# Altium PCB BMSPCB.PcbDoc
Units mil, origin at the board's own origin, x right, y up, seen from the top; angles counter-clockwise.
Board outline 6000 x 4000 mil, 2 copper layers (Top Layer, Bottom Layer); 19 components, 32 nets, 47 pads, 0 vias.
Unrouted connection lines stored in the file: 24.
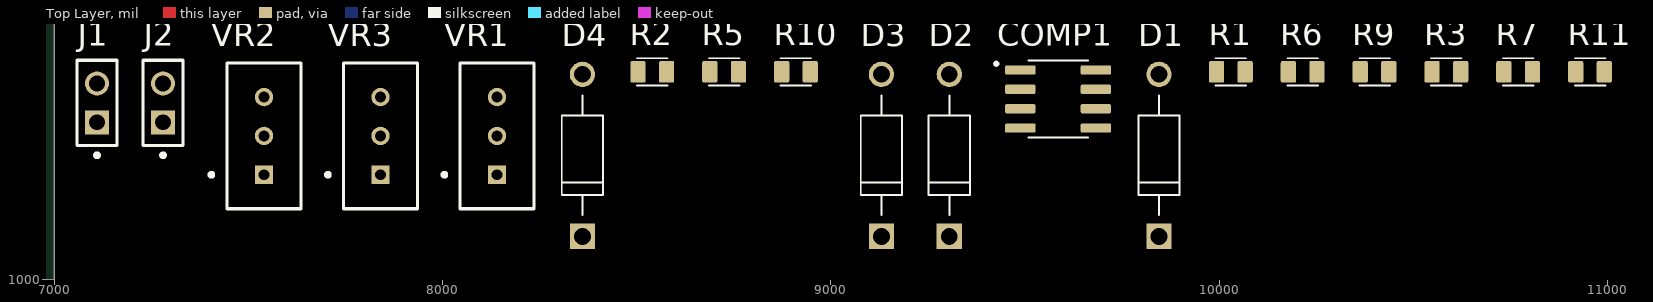
[diagram p0: Top Layer view]
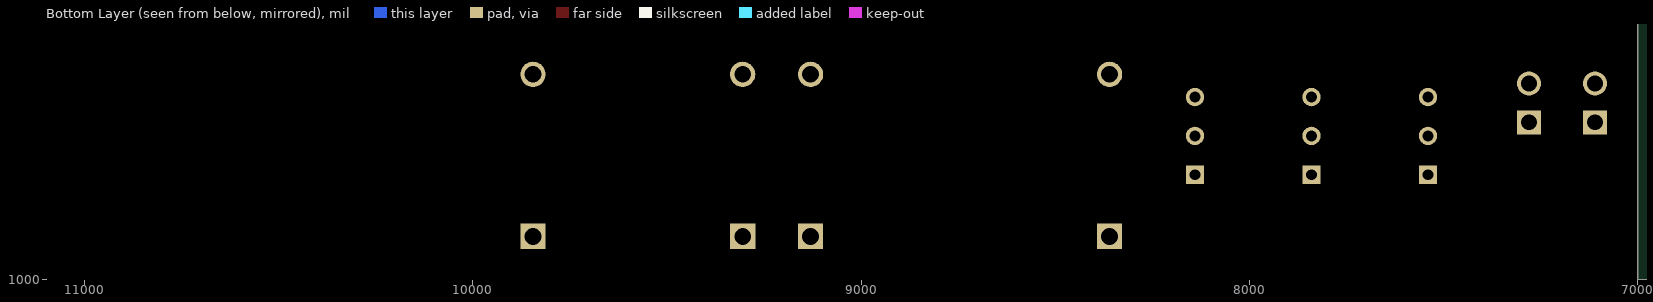
[diagram p1: Bottom Layer view, seen from below]

## Layer stack, top to bottom
Top Solder: solder mask 0.4, Solder Resist, Dk 3.5
Top Layer: signal copper 1.4
Dielectric 1: dielectric 12.6, FR-4, Dk 4.8
Bottom Layer: signal copper 1.4
Bottom Solder: solder mask 0.4, Solder Resist, Dk 3.5

## Board outline
1000,1000 7000,1000 7000,5000 1000,5000

## Design rules (kind name [scope] priority, off if disabled: settings)
Clearance [All] p1: gap=10 ignorepadtopadclearanceinfootprint=FALSE except(0: Arc-Hole Track-Hole SMDPad-Hole THPad-Hole Via-Hole Fill-Hole Poly-Hole Region-Hole Text-Hole)
PolygonConnect [All] p1: connectstyle=Relief reliefconductorwidth=10 reliefentries=4 polygonreliefangle="90 Angle" airgapwidth=10
RoomDefinition BMS-Shem-v1 [InComponentClass('BMS-Shem-v1')] p1: confinementstyle=ConfineIn formatcopy=TRUE lockcomponents=FALSE outline 7045,1060 11045,1060 11045,1680 7045,1680
RoutingVias [All] p1: holewidth=28 width=50 viastyle="Through Hole" minholewidth=28 minwidth=50 maxholewidth=28 maxwidth=50
SolderMaskExpansion [All] p1: expansion=4 istentingtop=FALSE
Width [All] p1: maxlimit=10 minlimit=10 preferedwidth=10
30 further rules are at their usual default settings.

## Components (designator, comment, footprint, x,y, rotation, side; value= is the part's Value field where it differs from the comment)
COMP1 "TL431" SOIC127P599X175-8N 9585,1465 r0 top
D1 "Diode" DIOAD1060W80L520D270 9845,1320 r90 top
D2 "Diode" DIOAD1060W80L520D270 9305,1320 r90 top
D3 "Diode" DIOAD1060W80L520D270 9130,1320 r90 top
D4 "Diode" DIOAD1060W80L520D270 8360,1320 r90 top
J1 "M20-9990246" FP-M20-9990246-MFG 7110,1455 r90 top
J2 "M20-9990246" FP-M20-9990246-MFG 7280,1455 r90 top
R1 "20k" RESC2012X65N 10030,1535 r0 top
R2 "20k" RESC2012X65N 8540,1535 r0 top
R3 "1k" RESC2012X65N 10585,1535 r0 top
R5 "20k" RESC2012X65N 8725,1535 r0 top
R6 "20k" RESC2012X65N 10215,1535 r0 top
R7 "1k" RESC2012X65N 10770,1535 r0 top
R9 "20k" RESC2012X65N 10400,1535 r0 top
R10 "20k" RESC2012X65N 8910,1535 r0 top
R11 "1k" RESC2012X65N 10955,1535 r0 top
VR1 "Res_Bourns_3296W-1-502LF_eec" Bourns_3296W-1-502LF_0 8140,1370 r0 top value=5kΩ
VR2 "Res_Bourns_3296W-1-502LF_eec" Bourns_3296W-1-502LF_0 7540,1370 r0 top value=5kΩ
VR3 "Res_Bourns_3296W-1-502LF_eec" Bourns_3296W-1-502LF_0 7840,1370 r0 top value=5kΩ

## Footprints (in the part's own frame and the unit in brackets; to place one, negate y for a bottom-side part, rotate by r counter-clockwise, add the part's x,y. Pads: shape width x height; smd on the part's side, far side on the other; paste and mask are expansions set on the pad)
Bourns_3296W-1-502LF_0 [mm]
  rect 1.2x1.2 hole 0.7 paste-1000 mask+0: 1(0.005,-2.54)
  round 1.2 hole 0.7 paste-1000 mask+0: 2(0.005,0) 3(0.005,2.54)
  silkscreen extent -3.56,-4.76 2.41,4.76, body extent -2.58,-4.99 2.58,4.99, height 0.25
DIOAD1060W80L520D270 [mm]
  round 1.65 hole 1.1: A(5.3,0)
  rect 1.65x1.65 hole 1.1: C(-5.3,0)
  silkscreen extent -3.9,-1.35 3.9,1.35
FP-M20-9990246-MFG [mm]
  rect 1.57x1.57 hole 1.02 paste-1000 mask+0: 1(-1.27,0)
  round 1.57 hole 1.02 paste-1000 mask+0: 2(1.27,0)
  silkscreen extent -3.55,-1.32 2.79,1.32, body extent -2.89,-1.42 2.89,1.42, height 0.25
RESC2012X65N [mm]
  rrect25% 1x1.42 smd: 1(-0.935,0) 2(0.935,0)
  silkscreen extent -1,-0.89 1,0.89
SOIC127P599X175-8N [mm]
  rrect25% 1.97x0.6 smd: 1(-2.47,1.905) 2(-2.47,0.635) 3(-2.47,-0.635) 4(-2.47,-1.905) 5(2.47,-1.905) 6(2.47,-0.635) 7(2.47,0.635) 8(2.47,1.905)
  silkscreen extent -4.14,-2.52 1.95,2.52

## Part data
COMP1: "Adjustable precision shunt regulator 8-SOIC 0 to 70", Package="SOIC-8 Texas Instruments", Availability=Good, DigiKey-Purchase-URL=https://snapeda.com/shop?store=DigiKey&id=4775895, MF="Texas Instruments", Mouser-Purchase-URL=https://snapeda.com/shop?store=Mouser&id=4775895, MP=TL431CD, Price=None, SnapEDA_Link=https://www.snapeda.com/parts/TL431CD/Texas%20Instruments/view-part/4775895/?ref=snap, Texas_Instruments-Purchase-URL=https://snapeda.com/shop?store=Texas+Instruments&id=4775895
D1 D2 D3 D4: "Diode Standard 1000V 1A Through Hole DO-204AL _DO-41_", Package="DO-41 Good-Ark", Availability=Unavailable, MF="ON Semiconductor", MP=1N4007, Price=None, SnapEDA_Link=https://www.snapeda.com/parts/1N4007/ON%20Semiconductor/view-part/2816213/?ref=snap
J1 J2: library part CMP-15831-000009-1, "CONN HEADER VERT 2POS 2.54MM", Current Rating=3A, Manufacturer=Harwin, Temperature="-40°C to +105°C", Temperature Range High=+105°C, Temperature Range Low=-40°C, Automotive=No, Category=Conn, ComponentLink2Description=Datasheet, ComponentLink2URL=https://cdn.harwin.com/pdfs/M20-999.pdf, Conn Gender=Male, Conn Orientation=Vertical, Contact Material=Tin,Nickel, Device Class L1=Connectors, Device Class L2="Headers and Wire Housings", Device Class L3=unset, Digikey Description="CONN HEADER VERT 2POS 2.54MM", Height=8.99mm, Lead Free=Yes, Manufacturer Part Number=M20-9990246, Mouser Description="2.54mm (0.1\") Pitch SIL Vertical PC Tail Pin Header, 6.1mm mating pin height, tin, 2 contacts", Number Of Contacts=2, Number Of Rows=1, Octopart=https://octopart.com/m20-9990246-harwin-2590635, Package=M20-9990246, Pitch=2.54mm, RoHS=TRUE
R1 R2 R5 R6 R9 R10: library part Resistor, "RES 20k OHM 1% 1/4W 0805", Package=0805, Power_Rating=".25 W", Resistance=.33, Tolerance=1%, Availability=Unavailable, EU_RoHS_Compliance="Compliant with Exemptions", MF="TE Connectivity", MP=2-2176053-0, Price=None, SnapEDA_Link=https://www.snapeda.com/parts/2-2176053-0/TE%20Connectivity/view-part/2214508/?ref=snap
R3 R7 R11: library part Resistor, "RES 1k OHM 1% 1/4W 0805", Package=0805, Power_Rating=".25 W", Resistance=.33, Tolerance=1%, Availability=Unavailable, EU_RoHS_Compliance="Compliant with Exemptions", MF="TE Connectivity", MP=2-2176053-0, Price=None, SnapEDA_Link=https://www.snapeda.com/parts/2-2176053-0/TE%20Connectivity/view-part/2214508/?ref=snap
VR1 VR2 VR3: "RES TRIMMER 5K OHM 0.5W PC PIN", Digikey Part Number=3296W-502LF-ND, Manufacturer=Bourns, Mouser Part Number=652-3296W-1-502LF, Package=PTH_9MM53_4MM83, Part Number=3296W-1-502LF, Power=500mW, Resistance=5kΩ, Temperature="-55°C to +125°C", Temperature Coefficient=±100ppm/°C, Temperature Range High=+125°C, Temperature Range Low=-55°C, Tolerance=±10%, ComponentLink1Description=Upverter, ComponentLink1URL=https://upverter.com/upn/revision/1712d714ad2c9eb5/, ComponentLink2Description=Datasheet, ComponentLink2URL=http://www.bourns.com/docs/Product-Datasheets/3296.pdf, Digikey Description="RES TRIMMER 5K OHM 0.5W PC PIN", helpURL=https://upverter.com/upn/revision/1712d714ad2c9eb5/, Lead Free=yes, Number of Turns=25, Price=1.73531008228, RoHS=TRUE, Supplier 1=Digi-Key, Supplier 2=Mouser, Supplier Part Number 1=3296W-502LF-ND, Supplier Part Number 2=652-3296W-1-502LF

## Nets (pads, with @x,y where several pads share a name; then routed paths per layer and width w, separated by ;. In a path a pad name is that pad's centre, name@x,y a point inside that pad or via, vN(x,y) a via of type N, cw(c..) or ccw(c..) an arc to the next point about the centre after c; other vN are vias at no path point)
NetCOMP1_1: COMP1.1 R3.1
NetCOMP1_6: COMP1.6 D4.C R6.2 R7.2 VR1.1 VR1.2
NetCOMP1_8: COMP1.8 R1.1 R2.2
NetCOMP2_1: R7.1
NetCOMP2_6: R9.2 R11.2 VR2.1 VR2.2
NetCOMP2_8: R5.2 R6.1
NetCOMP3_1: R11.1
NetCOMP3_6: J1.2 J2.2 VR3.1 VR3.2
NetCOMP3_8: R9.1 R10.2
NetD1_A: D1.A
NetD1_C: D1.C D2.A
NetD2_C: D2.C D3.A
NetD3_C: D3.C D4.A
NetD5_A: 
NetD5_C: 
NetD6_C: 
NetD7_C: 
NetD9_A: 
NetD9_C: 
NetD10_C: 
NetD11_C: 
NetDP1_0: J2.1 R1.2 R3.2
NetJ1_1: J1.1
NetLED1_A: 
NetLED2_A: 
NetLED3_A: 
NetR2_1: R2.1 VR1.3
NetR5_1: R5.1 VR2.3
NetR10_1: R10.1 VR3.3
NetR13_2: 
NetR14_2: 
NetR15_1: 
pads on no net: COMP1.2 COMP1.3 COMP1.4 COMP1.5 COMP1.7